# EAGLE board Pcb (EAGLE 9.7.0)
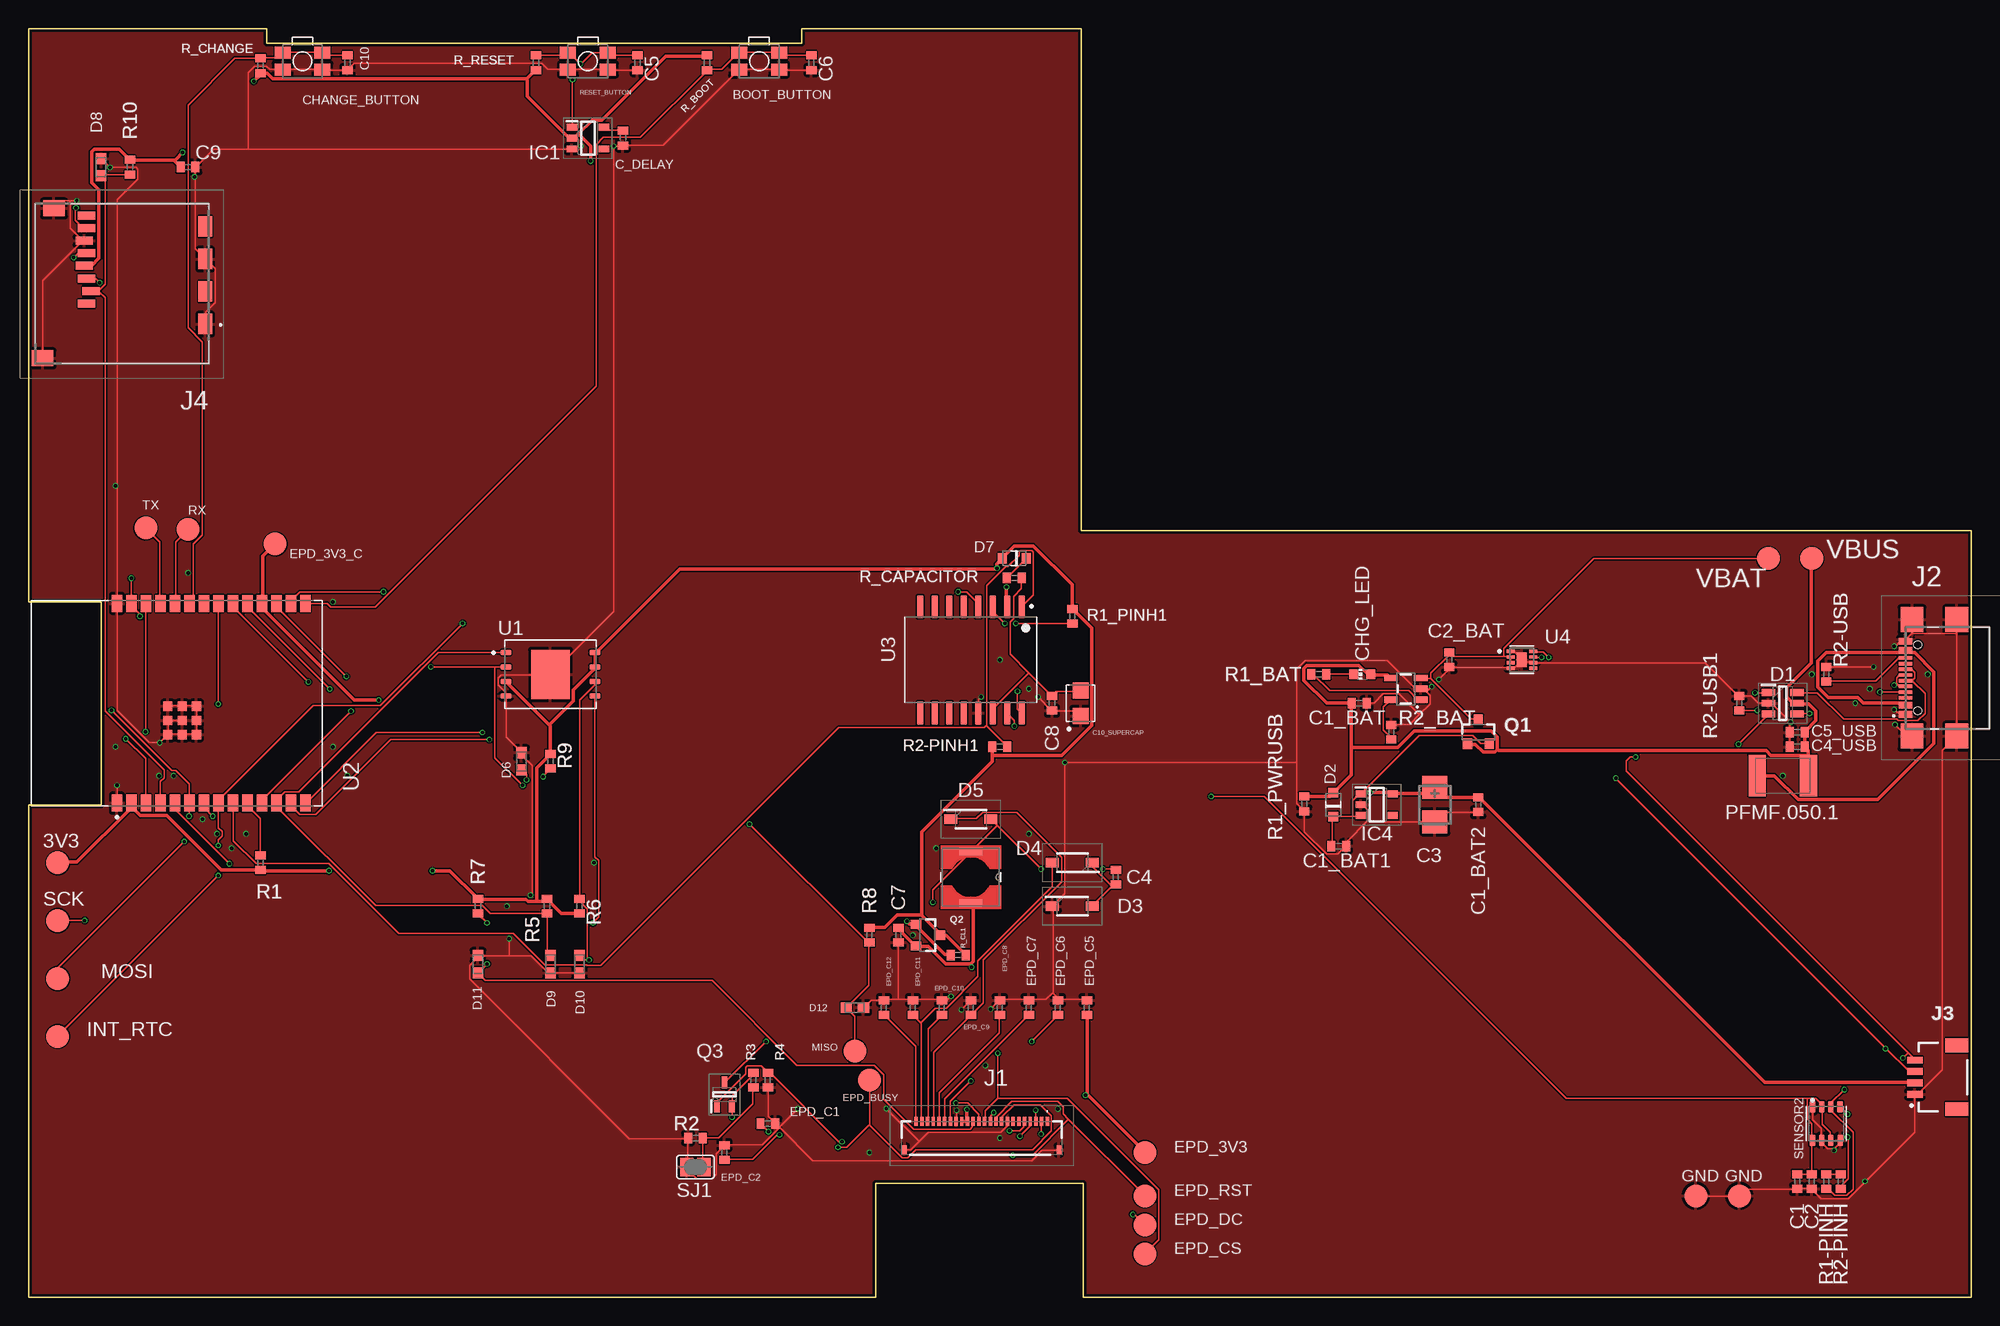
[diagram p0: board, top side]
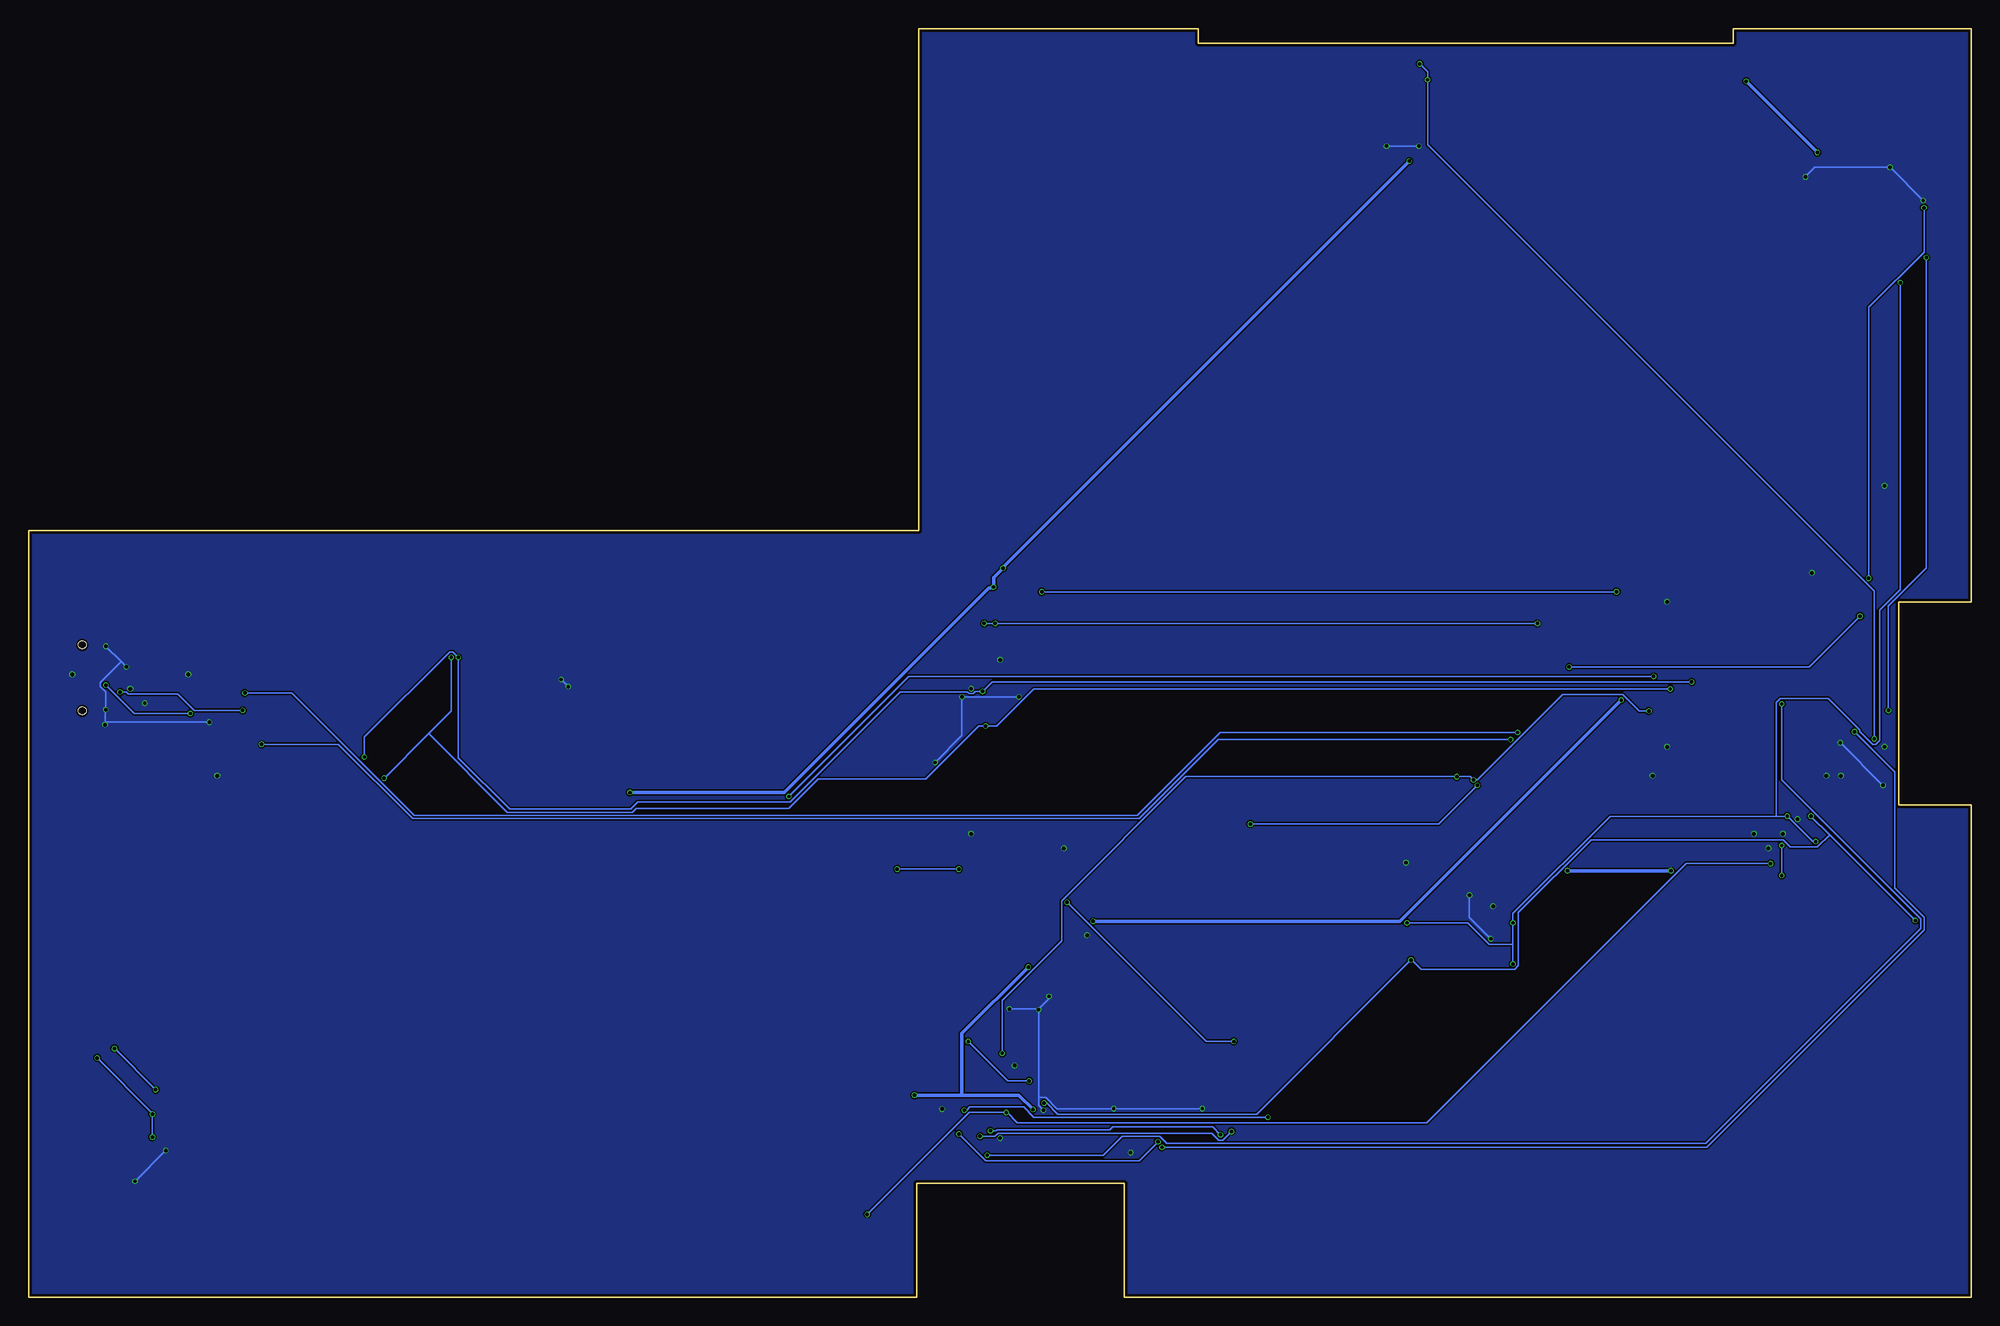
[diagram p1: board, bottom side, seen from below]

Size 170.2 x 111.2 mm. Coordinates in mm from the lower left corner, seen from the top.
Outline: 0,0 0,43.18 6.35,43.18 6.35,60.96 0,60.96 0,111.2 20.89,111.2 20.89,109.9 67.75,109.9 67.75,111.2 92.2,111.2 92.2,67.2 170.2,67.2 170.2,0 92.4,0 92.4,10 74.2,10 74.2,0 0,0
Copper layers (1*16): Top 0.035mm / dielectric 1.6mm / Bottom 0.035mm
Design rules "jlcpcb-2layers.dru *": minimum track width 0.15mm, minimum drill 0.3mm, track to track 5mil, track to pad 5mil, pad to pad 5mil, via to via 5mil, smd to smd 5mil, copper to edge 0.2mm, drill to drill 6mil, minimum pad ring 10mil, minimum via ring 3mil, stop-mask expansion 4mil, vias tented up to drill 0mil, thermal gap 10mil
Net classes: 1 power: width 0.3 mm

## Footprints (pad centres in the part's own frame; a part is rotated, then mirrored left to right if it is on the bottom)
MYBUTTON = smd 1.4 x 1.05: 1 1.75,0.75; 2 -1.75,0.75; 3 -1.75,-0.75; 4 1.75,-0.75
EAGLE-LTSPICE_C0402 = smd 0.7 x 0.9: 1 -0.65,0; 2 0.65,0
RCL_CT3528 = smd 2 x 2.2: + -1.5,0; - 1.5,0
CAPCP3225X100N = smd 1.4 x 1.4: 1 -1.1,0; 2 1.1,0
ADAFRUIT_CHIP-LED0603 = smd 0.8 x 0.8: A 0,-0.75; C 0,0.75
SOT95P280X145-6N = smd 1.2 x 0.6: 1 -1.25,0.95; 2 -1.25,0; 3 -1.25,-0.95; 4 1.25,-0.95; 5 1.25,0; 6 1.25,0.95
ESP32_WROVER_AVX---SD0805S020S1R0_AVX_SD0805S020S1R0_0 = smd 0.8 x 0.9: 1 -1.05,0; 2 1.05,0
SOD3716X135N = smd 1.15 x 0.8: 1 -1.75,0; 2 1.75,0
DIOC1608X36N = smd 0.97 x 0.94: 1 -0.75,0; 2 0.75,0
SOT95P280X125-5N = smd 0.9 x 0.6: 1 -1.4,0.95; 2 -1.4,0; 3 -1.4,-0.95; 4 1.4,-0.95; 5 1.4,0.95
SOT95P280X120-5N = smd 0.9 x 0.6: 1 -1.4,0.95; 2 -1.4,0; 3 -1.4,-0.95; 4 1.4,-0.95; 5 1.4,0.95
FH34SRJ24S05SH99 = smd 0.3 x 0.8: 1 5.75,1.45; 2 5.25,1.45; 3 4.75,1.45; 4 4.25,1.45; 5 3.75,1.45; 6 3.25,1.45; 7 2.75,1.45; 8 2.25,1.45; 9 1.75,1.45; 10 1.25,1.45; 11 0.75,1.45; 12 0.25,1.45; 13 -0.25,1.45; 14 -0.75,1.45; 15 -1.25,1.45; 16 -1.75,1.45; 17 -2.25,1.45; 18 -2.75,1.45; 19 -3.25,1.45; 20 -3.75,1.45; 21 -4.25,1.45; 22 -4.75,1.45; 23 -5.25,1.45; 24 -5.75,1.45 | smd 0.4 x 0.8: MP1 6.75,-1.05; MP2 -6.75,-1.05
SAMACSYS_PARTS_USB4110GFA = smd 0.3 x 1.15: A1 -3.35,3.678; A4 -2.55,3.678; A5 -1.25,3.678; A6 -0.25,3.678; A7 0.25,3.678; A8 1.25,3.678; A9 2.55,3.678; A12 3.35,3.678; B1 3.05,3.678; B4 2.25,3.678; B5 1.75,3.678; B6 0.75,3.678; B7 -0.75,3.678; B8 -1.75,3.678; B9 -2.25,3.678; B12 -3.05,3.678 | smd 2.18 x 2: MP1 -5.11,-0.827; MP2 5.11,-0.827; MP3 -5.11,3.103; MP4 5.11,3.103 | hole 0.65: -2.89,2.603; 2.89,2.603
JST04_1MM_RA = smd 0.6 x 1.35: 1 -1.5,0; 2 -0.5,0; 3 0.5,0; 4 1.5,0 | smd 1.2 x 2: NC1 2.8,-3.675; NC2 -2.8,-3.675
112ATAARR03ATTEND = smd 1.8 x 1.2: G1 10.6,10.4; G2 4.9,10.4; S1 7.75,10.4; S2 2.05,10.4 | smd 1.4 x 1.9: G3 13.6,-3.85; G4 0.45,-2.85 | smd 0.7 x 1.5: P1 8.8,0; P2 7.7,0.4; P3 6.6,0; P4 5.5,-0.2; P5 4.4,0; P6 3.3,-0.2; P7 2.2,0; P8 1.1,0
IND_4828-WE-TPC_WRE = smd 0.635 x 2.032: 1 -2.286,0; 2 2.286,0
ESP32_WROVER_SPARKFUN-IC-POWER_SOT23-5 = smd 0.55 x 1.2: 1 -0.95,-1.3; 2 0,-1.3; 3 0.95,-1.3; 4 0.95,1.3; 5 -0.95,1.3
ESP32C6_VARISTOR_CT/CN1812 = smd 1.5 x 3.6: 1 -2.25,0; 2 2.25,0
ESP32_WROVER_SPARKFUN-DISCRETESEMI_SOT23-3 = smd 0.8 x 0.9: 1 -0.95,-1; 2 0.95,-1; 3 0,1.1
SOT65P210X110-3N = smd 1.05 x 0.5: 1 -1.05,0.65; 2 -1.05,-0.65; 3 1.05,0
ESP32_WROVER_EAGLE-LTSPICE_R0402 = smd 0.7 x 0.9: 1 -0.65,0; 2 0.65,0
ESP32_WROVER_BME680_PSON80P300X300X100-8N = smd 1.016 x 0.5: 1 1.458,1.2; 2 1.458,0.4; 3 1.458,-0.4; 4 1.458,-1.2; 5 -1.458,-1.22; 6 -1.458,-0.4; 7 -1.458,0.4; 8 -1.458,1.2
SJ = smd 1.168 x 1.6: 1 -0.762,0; 2 0.762,0
TP20R = smd 2 x 2: TP 0,0
SON127P600X800X80-9N = smd 0.94 x 0.44: 1 -3.895,1.905; 2 -3.895,0.635; 3 -3.895,-0.635; 4 -3.895,-1.905; 5 3.895,-1.905; 6 3.895,-0.635; 7 3.895,0.635; 8 3.895,1.905 | smd 3.4 x 4.3: 9 0,0
XCVR_ESP32-C6-WROOM-1-N8 = smd 1.5 x 0.9: 1 -8.75,5.26; 2 -8.75,3.99; 3 -8.75,2.72; 4 -8.75,1.45; 5 -8.75,0.18; 6 -8.75,-1.09; 7 -8.75,-2.36; 8 -8.75,-3.63; 9 -8.75,-4.9; 10 -8.75,-6.17; 11 -8.75,-7.44; 12 -8.75,-8.71; 13 -8.75,-9.98; 14 -8.75,-11.25; 15 8.75,-11.25; 16 8.75,-9.98; 17 8.75,-8.71; 18 8.75,-7.44; 19 8.75,-6.17; 20 8.75,-4.9; 21 8.75,-3.63; 22 8.75,-2.36; 23 8.75,-1.09; 24 8.75,0.18; 25 8.75,1.45; 26 8.75,2.72; 27 8.75,3.99; 28 8.75,5.26 | smd 0.8 x 0.8: 29_1 -2.755,0.79; 29_2 -1.505,0.79; 29_3 -0.255,0.79; 29_4 -2.755,-0.46; 29_5 -1.505,-0.46; 29_6 -0.255,-0.46; 29_7 -2.755,-1.71; 29_8 -1.505,-1.71; 29_9 -0.255,-1.71
SOIC127P1032X265-16N = smd 2.05 x 0.59: 1 -4.655,4.445; 2 -4.655,3.175; 3 -4.655,1.905; 4 -4.655,0.635; 5 -4.655,-0.635; 6 -4.655,-1.905; 7 -4.655,-3.175; 8 -4.655,-4.445; 9 4.655,-4.445; 10 4.655,-3.175; 11 4.655,-1.905; 12 4.655,-0.635; 13 4.655,0.635; 14 4.655,1.905; 15 4.655,3.175; 16 4.655,4.445
SON50P200X200X80-9N = smd 0.76 x 0.27: 1 -0.985,0.75; 2 -0.985,0.25; 3 -0.985,-0.25; 4 -0.985,-0.75; 5 0.985,-0.75; 6 0.985,-0.25; 7 0.985,0.25; 8 0.985,0.75 | smd 0.9 x 1.3: 9 0,0

## Placement (x,y rotation side)
BOOT_BUTTON  BUTTON_CUSYOMV1  [MYBUTTON]  64,108.35 180 top
C1  100nF  [EAGLE-LTSPICE_C0402]  154.94,10.16 270 top
C1_BAT  4.7uF  [EAGLE-LTSPICE_C0402]  116.57,52.07 0 top
C1_BAT1  4.7uF  [EAGLE-LTSPICE_C0402]  114.78,39.55 0 top
C1_BAT2  4.7uF  [EAGLE-LTSPICE_C0402]  127,43.18 270 top
C2  100nF  [EAGLE-LTSPICE_C0402]  156.21,10.16 270 top
C2_BAT  4.7uF  [EAGLE-LTSPICE_C0402]  124.46,55.88 270 top
C3  100uF TANT  [RCL_CT3528]  123.19,43.18 270 top
C4  4.7uF/25V  [EAGLE-LTSPICE_C0402]  95.25,36.83 90 top
C4_USB  100nF  [EAGLE-LTSPICE_C0402]  154.94,48.26 180 top
C5  1uF  [EAGLE-LTSPICE_C0402]  53.34,108.2 270 top
C5_USB  4.7uF  [EAGLE-LTSPICE_C0402]  154.94,49.53 180 top
C6  100nF  [EAGLE-LTSPICE_C0402]  68.58,108.2 270 top
C7  10uF  [EAGLE-LTSPICE_C0402]  76.2,31.75 270 top
C8  100nF  [EAGLE-LTSPICE_C0402]  89.66,52.07 270 top
C9  100nF  [EAGLE-LTSPICE_C0402]  13.97,99.06 0 top
C10  100nF  [EAGLE-LTSPICE_C0402]  27.94,108.2 270 top
C10_SUPERCAP  CPH3225A  [CAPCP3225X100N]  92.16,52.07 90 top
C_DELAY  100nF  [EAGLE-LTSPICE_C0402]  52.07,101.6 270 top
CHANGE_BUTTON  BUTTON_CUSYOMV1  [MYBUTTON]  24,108.35 180 top
CHG_LED  [ADAFRUIT_CHIP-LED0603]  116.84,54.61 90 top
D1  USBLC6-2SC6Y  [SOT95P280X145-6N]  153.67,52.07 0 top
D2  ESP32_WROVER_AVX---SD0805S020S1R0_AVX_SD0805S020S1R0_0_0AVX_SD0805S020S1R0_0_0  [ESP32_WROVER_AVX---SD0805S020S1R0_AVX_SD0805S020S1R0_0]  114.3,43.18 90 top
D3  MBR0530  [SOD3716X135N]  91.44,34.29 0 top
D4  MBR0530  [SOD3716X135N]  91.44,38.1 180 top
D5  MBR0530  [SOD3716X135N]  82.55,41.91 0 top
D6  PGB1010603MR  [DIOC1608X36N]  43.18,46.99 90 top
D7  ESP32_WROVER_AVX---SD0805S020S1R0_AVX_SD0805S020S1R0_0_0AVX_SD0805S020S1R0_0_0  [ESP32_WROVER_AVX---SD0805S020S1R0_AVX_SD0805S020S1R0_0]  86.36,64.77 180 top
D8  PGB1010603MR  [DIOC1608X36N]  6.35,99.06 90 top
D9  PGB1010603MR  [DIOC1608X36N]  45.72,29.21 270 top
D10  PGB1010603MR  [DIOC1608X36N]  48.26,29.21 270 top
D11  PGB1010603MR  [DIOC1608X36N]  39.37,29.21 90 top
D12  PGB1010603MR  [DIOC1608X36N]  72.39,25.4 0 top
EPD_C1  1uF/50V  [EAGLE-LTSPICE_C0402]  64.77,15.24 0 top
EPD_C2  1uF/50V  [EAGLE-LTSPICE_C0402]  60.96,12.7 90 top
EPD_C5  0.1uF/50V  [EAGLE-LTSPICE_C0402]  92.71,25.4 90 top
EPD_C6  1uF/50V  [EAGLE-LTSPICE_C0402]  90.17,25.4 90 top
EPD_C7  1uF/50V  [EAGLE-LTSPICE_C0402]  87.63,25.4 90 top
EPD_C8  1uF/50V  [EAGLE-LTSPICE_C0402]  85.09,25.4 90 top
EPD_C9  1uF/50V  [EAGLE-LTSPICE_C0402]  82.55,25.4 90 top
EPD_C10  1uF/50V  [EAGLE-LTSPICE_C0402]  80.01,25.4 90 top
EPD_C11  1uF/50V  [EAGLE-LTSPICE_C0402]  77.47,25.4 90 top
EPD_C12  1uF/50V  [EAGLE-LTSPICE_C0402]  74.93,25.4 90 top
IC1  BD5229G-TR  [SOT95P280X125-5N]  49,101.6 0 top
IC4  XC6220A331MR-G  [SOT95P280X120-5N]  118.11,43.18 0 top
J1  FH34SRJ-24S-0.5SH_99_  [FH34SRJ24S05SH99]  83.5,13.97 0 top
J2  SAMACSYS_PARTS_USB4110-GF-A  [SAMACSYS_PARTS_USB4110GFA]  168.1,54.3 90 top
J3  QWIIC_RIGHT_ANGLE  [JST04_1MM_RA]  165.25,19.3 90 top
J4  112A-TAAR-R03_ATTEND  [112ATAARR03ATTEND]  5.08,95.9 270 top
L1  68uH  [IND_4828-WE-TPC_WRE]  82.55,36.83 270 top
MCP  MCP73831  [ESP32_WROVER_SPARKFUN-IC-POWER_SOT23-5]  120.65,53.34 90 top
PFMF.050.1  [ESP32C6_VARISTOR_CT/CN1812]  153.67,45.72 0 top
Q1  20V/4.2A/52mΩ/1.4W  [ESP32_WROVER_SPARKFUN-DISCRETESEMI_SOT23-3]  127,49.53 0 top
Q2  20V/4.2A/52mΩ/1.4W  [ESP32_WROVER_SPARKFUN-DISCRETESEMI_SOT23-3]  78.74,31.75 270 top
Q3  SI1308EDL-T1-GE3  [SOT65P210X110-3N]  60.96,17.78 90 top
R1  10K  [ESP32_WROVER_EAGLE-LTSPICE_R0402]  20.32,38.1 90 top
R1-PINH  10K  [ESP32_WROVER_EAGLE-LTSPICE_R0402]  157.48,10.16 90 top
R1_BAT  200  [ESP32_WROVER_EAGLE-LTSPICE_R0402]  113.03,54.61 0 top
R1_PINH1  10K  [ESP32_WROVER_EAGLE-LTSPICE_R0402]  91.44,59.69 90 top
R1_PWRUSB  100K  [ESP32_WROVER_EAGLE-LTSPICE_R0402]  111.76,43.25 90 top
R2  2.2  [ESP32_WROVER_EAGLE-LTSPICE_R0402]  58.42,13.97 0 top
R2-PINH  10K  [ESP32_WROVER_EAGLE-LTSPICE_R0402]  158.75,10.16 90 top
R2-PINH1  10K  [ESP32_WROVER_EAGLE-LTSPICE_R0402]  85.09,48.26 180 top
R2-USB  5k1  [ESP32_WROVER_EAGLE-LTSPICE_R0402]  157.48,54.61 90 top
R2-USB1  5k1  [ESP32_WROVER_EAGLE-LTSPICE_R0402]  149.86,52.07 270 top
R2_BAT  2K  [ESP32_WROVER_EAGLE-LTSPICE_R0402]  119.38,49.53 270 top
R3  0.47  [ESP32_WROVER_EAGLE-LTSPICE_R0402]  63.5,19.05 270 top
R4  10K  [ESP32_WROVER_EAGLE-LTSPICE_R0402]  64.77,19.05 270 top
R5  10K  [ESP32_WROVER_EAGLE-LTSPICE_R0402]  45.42,34.29 90 top
R6  10K  [ESP32_WROVER_EAGLE-LTSPICE_R0402]  48.26,34.29 270 top
R7  10K  [ESP32_WROVER_EAGLE-LTSPICE_R0402]  39.37,34.29 90 top
R8  10K  [ESP32_WROVER_EAGLE-LTSPICE_R0402]  73.66,31.75 90 top
R9  10K  [ESP32_WROVER_EAGLE-LTSPICE_R0402]  45.72,46.99 90 top
R10  10K  [ESP32_WROVER_EAGLE-LTSPICE_R0402]  8.89,99.06 90 top
R_BOOT  10K  [ESP32_WROVER_EAGLE-LTSPICE_R0402]  59.43,108.2 270 top
R_CAPACITOR  15  [ESP32_WROVER_EAGLE-LTSPICE_R0402]  86.36,63.06 180 top
R_CHANGE  10K  [ESP32_WROVER_EAGLE-LTSPICE_R0402]  20.32,107.95 90 top
R_CL1  10K  [ESP32_WROVER_EAGLE-LTSPICE_R0402]  81.43,30.01 180 top
R_RESET  10K  [ESP32_WROVER_EAGLE-LTSPICE_R0402]  44.45,108.2 90 top
RESET_BUTTON  BUTTON_CUSYOMV1  [MYBUTTON]  49,108.35 180 top
SENSOR2  BME688  [ESP32_WROVER_BME680_PSON80P300X300X100-8N]  157.48,15.24 90 top
SJ1  [SJ]  58.42,11.43 0 top
TP1  TPTP20R  [TP20R]  10.28,67.43 0 top
TP2  TPTP20R  [TP20R]  13.97,67.31 0 top
TP3  TPTP20R  [TP20R]  152.4,64.77 0 top
TP4  TPTP20R  [TP20R]  146.05,8.89 0 top
TP5  TPTP20R  [TP20R]  149.86,8.89 0 top
TP6  TPTP20R  [TP20R]  72.39,21.59 0 top
TP7  TPTP20R  [TP20R]  2.54,27.94 0 top
TP8  TPTP20R  [TP20R]  2.55,33.02 0 top
TP9  TPTP20R  [TP20R]  73.66,19.05 0 top
TP10  TPTP20R  [TP20R]  97.79,3.81 0 top
TP11  TPTP20R  [TP20R]  97.79,6.35 0 top
TP12  TPTP20R  [TP20R]  97.79,8.89 0 top
TP13  TPTP20R  [TP20R]  21.6,66.04 0 top
TP14  TPTP20R  [TP20R]  156.21,64.77 0 top
TP15  TPTP20R  [TP20R]  2.54,22.86 0 top
TP16  TPTP20R  [TP20R]  2.54,38.1 0 top
TP17  TPTP20R  [TP20R]  97.79,12.7 0 top
U1  W25Q512JVEIQ  [SON127P600X800X80-9N]  45.72,54.61 0 top
U2  ESP32-C6-WROOM-1-N8  [XCVR_ESP32-C6-WROOM-1-N8]  13,52.07 90 top
U3  DS3231SN#  [SOIC127P1032X265-16N]  82.55,55.88 270 top
U4  MAX17048G+T10  [SON50P200X200X80-9N]  130.81,55.88 0 top

## Library data of the parts
BOOT_BUTTON CHANGE_BUTTON CHG_LED PFMF.050.1 RESET_BUTTON SJ1 TP1-TP17 = DeskAssistant v19 v1
C1 C1_BAT C1_BAT1 C1_BAT2 C2 C2_BAT C4 C4_USB C5 C5_USB C6-C10 C_DELAY EPD_C1 EPD_C2 EPD_C5-EPD_C12 = DeskAssistant v19 v1; SPICEMODEL: NONE; SPICEPREFIX: C
C3 = DeskAssistant v19 v1; SPICEPREFIX: C
C10_SUPERCAP = DeskAssistant v19 v1; AVAILABILITY: Not in stock; CHECK_PRICES: https://www.snapeda.com/parts/CPH3225A/Seiko+Instruments/view-part/?ref=eda; DESCRIPTION: 11 mF (EDLC) Supercapacitor 3.3 V 1210 (3225 Metric) - -; MF: Seiko Instruments; MP: CPH3225A; PACKAGE: 1210 Seiko; PRICE: None; PURCHASE-URL: https://www.snapeda.com/api/url_track_click_mouser/?unipart_id=562593&manufacturer=Seiko Instruments&part_name=CPH3225A&search_term=None; SNAPEDA_LINK: https://www.snapeda.com/parts/CPH3225A/Seiko+Instruments/view-part/?ref=snap
D1 = DeskAssistant v19 v1; AVAILABILITY: In Stock; CHECK_PRICES: https://www.snapeda.com/parts/USBLC6-2SC6Y/STMicroelectronics/view-part/?ref=eda; DESCRIPTION: 17V Clamp 5A (8/20µs) Ipp Tvs Diode Surface Mount SOT-23-6; MF: STMicroelectronics; MP: USBLC6-2SC6Y; PACKAGE: SOT-23-6 STMicroelectronics; PRICE: None; SNAPEDA_LINK: https://www.snapeda.com/parts/USBLC6-2SC6Y/STMicroelectronics/view-part/?ref=snap
D2 D7 = DeskAssistant v19 v1; CENTROID_NOT_SPECIFIED: No; DATASHEET: http://datasheets.avx.com/schottky.pdf; DIGIKEY_DESCRIPTION: DIODE SCHOTTKY 20V 1A 0805; DIGIKEY_PART_NUMBER: 478-7800-1-ND; LEAD_FREE: yes; MF: AVX; MOUSER_PART_NUMBER: 581-SD0805S020S1R0; PACKAGE: 0805 (2012 metric); PREFIX: D; ROHS: yes; SER: SD0805S020S1R0; TEMPERATURE_RANGE_HIGH: +125°C; TEMPERATURE_RANGE_LOW: -55°C
D3-D5 = DeskAssistant v19 v1; AVAILABILITY: In Stock; CHECK_PRICES: https://www.snapeda.com/parts/MBR0530/Onsemi/view-part/?ref=eda; DESCRIPTION: Diode Schottky 30 V 500mA Surface Mount SOD-123; MF: ON Semiconductor; MP: MBR0530; PACKAGE: SOD-123-2 ON Semiconductor; PRICE: None; PURCHASE-URL: https://www.snapeda.com/api/url_track_click_mouser/?unipart_id=179458&manufacturer=ON Semiconductor&part_name=MBR0530&search_term=None; SNAPEDA_LINK: https://www.snapeda.com/parts/MBR0530/Onsemi/view-part/?ref=snap
D6 D8-D12 = DeskAssistant v19 v1; AVAILABILITY: In Stock; CHECK_PRICES: https://www.snapeda.com/parts/PGB1010603MR/Littelfuse/view-part/?ref=eda; DESCRIPTION: 150V (Typ) Clamp - Ipp Tvs Diode Surface Mount 0603 (1608 Metric); MF: Littelfuse Inc.; MP: PGB1010603MR; PACKAGE: 0603 Littelfuse Inc.; PRICE: None; PURCHASE-URL: https://www.snapeda.com/api/url_track_click_mouser/?unipart_id=5659453&manufacturer=Littelfuse Inc.&part_name=PGB1010603MR&search_term=None; SNAPEDA_LINK: https://www.snapeda.com/parts/PGB1010603MR/Littelfuse/view-part/?ref=snap
IC1 = DeskAssistant v19 v1; DESCRIPTION: Voltage Detector with Adjustable Delay Time: CMOS processes are utilized to develop high precision, low current consumption CMOS reset ICs that allow arbitrary setting of the delay time. The extensive lineup includes both Nch Open Drain and CMOS output types in a wide range of detection voltages (from 2.3V to 6.0V, in 0.1V steps), enabling selection of the ideal solution based on customer requirements. In addition, the entire series is of course both lead-free and RoHS-compliant.; HEIGHT: 1.25mm; MANUFACTURER_NAME: ROHM Semiconductor; MANUFACTURER_PART_NUMBER: BD5229G-TR; MOUSER_PART_NUMBER: 755-BD5229G-TR; MOUSER_PRICE-STOCK: https://www.mouser.co.uk/ProductDetail/ROHM-Semiconductor/BD5229G-TR?qs=4kLU8WoGk0vvnhrrYwdszw%3D%3D
IC4 = DeskAssistant v19 v1; DESCRIPTION: LDO Voltage Regulators; HEIGHT: 1.2mm; MANUFACTURER_NAME: Torex; MANUFACTURER_PART_NUMBER: XC6220A331MR-G; MOUSER_PART_NUMBER: 865-XC6220A331MR-G; MOUSER_PRICE-STOCK: https://www.mouser.co.uk/ProductDetail/Torex-Semiconductor/XC6220A331MR-G?qs=AsjdqWjXhJ8ZSWznL1J0gg%3D%3D
J1 = DeskAssistant v19 v1; DESCRIPTION: 24 Position FFC, FPC Connector Contacts, Top and Bottom 0.020" (0.50mm) Surface Mount, Right Angle; HEIGHT: 1.1mm; MANUFACTURER_NAME: Hirose; MANUFACTURER_PART_NUMBER: FH34SRJ-24S-0.5SH(99); MOUSER_PART_NUMBER: 798-FH34SRJ24S05SH99; MOUSER_PRICE-STOCK: https://www.mouser.co.uk/ProductDetail/Hirose-Connector/FH34SRJ-24S-0.5SH99?qs=vcbW%252B4%252BSTIpKBl5ap9J8Fw%3D%3D
J2 = DeskAssistant v19 v1; DESCRIPTION: CONN USB 2.0 TYPE-C R/A SMT; HEIGHT: 3.26mm; MANUFACTURER_NAME: GCT (GLOBAL CONNECTOR TECHNOLOGY); MANUFACTURER_PART_NUMBER: USB4110-GF-A; MOUSER_PART_NUMBER: 640-USB4110-GF-A; MOUSER_PRICE-STOCK: https://www.mouser.co.uk/ProductDetail/GCT/USB4110-GF-A?qs=KUoIvG%2F9IlYiZvIXQjyJeA%3D%3D
J3 = DeskAssistant v19 v1; PROD_ID: CONN-13694
J4 = DeskAssistant v19 v1; DESCRIPTION: Micro SD Card Socket, Push-Push Type, Top Mount, SMT, H=1.83mm, 10u; HEIGHT: 1.9mm; MANUFACTURER_NAME: ATTEND; MANUFACTURER_PART_NUMBER: 112A-TAAR-R03 ATTEND
L1 = DeskAssistant v19 v1; COPYRIGHT: Copyright (C) 2024 Ultra Librarian. All rights reserved.; MANUFACTURER_PART_NUMBER: 744043680; MFR_NAME: Wurth Electronics
MCP = DeskAssistant v19 v1; PROD_ID: IC-09995
Q1 Q2 = DeskAssistant v19 v1; PROD_ID: TRAN-14388; SER: DMG2305UX-7
Q3 = DeskAssistant v19 v1; AVAILABILITY: In Stock; CHECK_PRICES: https://www.snapeda.com/parts/SI1308EDL-T1-GE3/Vishay+Siliconix/view-part/?ref=eda; DESCRIPTION: Si1308EDL-T1-GE3 N-channel MOSFET Transistor, 1.5 A, 30 V, 3-Pin SC-70 | Siliconix / Vishay SI1308EDL-T1-GE3; MF: Vishay Siliconix; MP: SI1308EDL-T1-GE3; PACKAGE: SOT-323 Vishay Semiconductor; PRICE: None; PURCHASE-URL: https://www.snapeda.com/api/url_track_click_mouser/?unipart_id=274603&manufacturer=Vishay Siliconix&part_name=SI1308EDL-T1-GE3&search_term=None; SNAPEDA_LINK: https://www.snapeda.com/parts/SI1308EDL-T1-GE3/Vishay+Siliconix/view-part/?ref=snap
R1 R1-PINH R1_BAT R1_PINH1 R1_PWRUSB R2 R2-PINH R2-PINH1 R2-USB R2-USB1 R2_BAT R3-R10 R_BOOT R_CAPACITOR R_CHANGE R_CL1 R_RESET = DeskAssistant v19 v1; SPICEMODEL: NONE; SPICEPREFIX: R
SENSOR2 = DeskAssistant v19 v1; AVAILABILITY: Unavailable; DESCRIPTION: Integrated Environmental Unit; MF: Bosch Sensortec; MP: BME680; PACKAGE: LGA-8 Bosch Tools; PRICE: None
U1 = DeskAssistant v19 v1; AVAILABILITY: In Stock; CHECK_PRICES: https://www.snapeda.com/parts/W25Q512JVEIQ/Winbond+Electronics/view-part/?ref=eda; DESCRIPTION: FLASH - NOR Memory IC 512Mb (64M x 8) SPI - Quad I/O 133 MHz 8-WSON (8x6); MF: Winbond Electronics; MP: W25Q512JVEIQ; PACKAGE: Package; PRICE: None; SNAPEDA_LINK: https://www.snapeda.com/parts/W25Q512JVEIQ/Winbond+Electronics/view-part/?ref=snap
U2 = DeskAssistant v19 v1; AVAILABILITY: In Stock; CHECK_PRICES: https://www.snapeda.com/parts/ESP32-C6-WROOM-1-N8/Espressif+Systems/view-part/?ref=eda; DESCRIPTION: Multiprotocol Modules ESP32-C6 module, Wi-Fi 6 in 2.4 GHz band, Bluetooth 5, Zigbee 3.0 and Thread. ESP34-WROOM Compatible - ENGINEERING SAMPLE; MF: Espressif Systems; MP: ESP32-C6-WROOM-1-N8; PACKAGE: None; PRICE: None; SNAPEDA_LINK: https://www.snapeda.com/parts/ESP32-C6-WROOM-1-N8/Espressif+Systems/view-part/?ref=snap
U3 = DeskAssistant v19 v1; AVAILABILITY: In Stock; CHECK_PRICES: https://www.snapeda.com/parts/DS3231SN%23/Analog+Devices/view-part/?ref=eda; DESCRIPTION: Extremely Accurate I²C-Integrated RTC/TCXO/Crystal; MF: Analog Devices; MP: DS3231SN#; PACKAGE: SOIC-16 Maxim; PRICE: None; PURCHASE-URL: https://www.snapeda.com/api/url_track_click_mouser/?unipart_id=99048&manufacturer=Analog Devices&part_name=DS3231SN#&search_term=None; SNAPEDA_LINK: https://www.snapeda.com/parts/DS3231SN%23/Analog+Devices/view-part/?ref=snap
U4 = DeskAssistant v19 v1; AVAILABILITY: In Stock; CHECK_PRICES: https://www.snapeda.com/parts/MAX17048G+T10/Analog+Devices/view-part/?ref=eda; DESCRIPTION: 3µA 1-Cell/2-Cell Fuel Gauge with ModelGauge; MF: Analog Devices; MP: MAX17048G+T10; PACKAGE: TDFN-8 Maxim; PRICE: None; PURCHASE-URL: https://www.snapeda.com/api/url_track_click_mouser/?unipart_id=329239&manufacturer=Analog Devices&part_name=MAX17048G+T10&search_term=None; SNAPEDA_LINK: https://www.snapeda.com/parts/MAX17048G+T10/Analog+Devices/view-part/?ref=snap

## Nets
3V3 [power]: C1_BAT2.1 C3.+ C9.1 D7.2 IC1.2 IC4.5 J3.2 J4.P4 Q2.3 R1.1 R1_PINH1.2 R2-PINH1.2 R5.2 R6.2 R7.2 R8.2 R9.2 R10.2 R_BOOT.1 R_CHANGE.1 R_CL1.1 R_RESET.1 TP16.TP U1.3 U1.7 U1.8 U2.2 U3.2
32KHZ: R2-PINH1.1 U2.9 U3.1
DN: D1.4 J2.A7 J2.B7
DP: D1.6 J2.A6 J2.B6
EPD_3V3 [power]: C7.1 EPD_C5.1 J1.15 J1.16 L1.2 Q2.2 TP17.TP
EPD_3V3_C [power]: Q2.1 R_CL1.2 TP13.TP U2.18
EPD_BUSY: J1.9 TP9.TP U2.26
EPD_CS: D6.1 J1.12 R9.1 TP10.TP U2.11
EPD_DC: J1.11 TP11.TP U2.5
EPD_RST: J1.10 TP12.TP U2.21
FLASH_CS: D9.1 R5.1 U1.1 U2.12
GDR: J1.2 Q3.1 R4.1
GND: BOOT_BUTTON.1 BOOT_BUTTON.2 C1.2 C1_BAT1.2 C1_BAT2.2 C1_BAT.2 C2.2 C2_BAT.2 C3.- C4_USB.2 C5.2 C5_USB.2 C6.2 C7.2 C8.2 C9.2 C10.2 C10_SUPERCAP.1 C_DELAY.2 CHANGE_BUTTON.1 CHANGE_BUTTON.2 D1.2 D3.1 D6.2 D8.2 D9.2 D10.2 D11.2 D12.2 EPD_C1.2 EPD_C2.2 EPD_C5.2 EPD_C6.2 EPD_C7.2 EPD_C8.2 EPD_C9.2 EPD_C10.2 EPD_C11.2 EPD_C12.2 IC1.3 IC4.2 J1.8 J1.17 J1.MP1 J1.MP2 J2.A1 J2.A12 J2.B1 J2.B12 J2.MP1 J2.MP2 J2.MP3 J2.MP4 J3.1 J4.G1 J4.G2 J4.G3 J4.G4 J4.P6 MCP.2 R1_PWRUSB.1 R2-USB1.1 R2-USB.2 R2.1 R2_BAT.1 R4.2 RESET_BUTTON.1 RESET_BUTTON.2 SENSOR2.1 SENSOR2.5 SENSOR2.7 SJ1.1 TP4.TP TP5.TP U1.4 U1.9 U2.1 U2.28 U2.29_1 U2.29_2 U2.29_3 U2.29_4 U2.29_5 U2.29_6 U2.29_7 U2.29_8 U2.29_9 U3.13 U4.1 U4.4 U4.6 U4.9
GPIO8: R1.2 U2.10
I2C_PW: C1.1 C2.1 SENSOR2.2 SENSOR2.6 SENSOR2.8 U2.17
INT_RTC: R1_PINH1.1 TP15.TP U2.8 U3.3
IO/BOOT: BOOT_BUTTON.3 BOOT_BUTTON.4 C6.1 R_BOOT.2 U2.15
IO/CHANGE: C10.1 CHANGE_BUTTON.3 CHANGE_BUTTON.4 R_CHANGE.2 U2.23
MISO: D12.1 J4.P7 R8.1 TP6.TP U1.2 U2.27
MOSI: D11.1 J1.14 J4.P3 R7.1 TP7.TP U1.5 U2.7
N$1: J2.A5 R2-USB1.2
N$2: J2.B5 R2-USB.1
N$3: C1_BAT1.1 D2.1 IC4.1 IC4.3 Q1.2
N$4: C4.1 D3.2 D4.1
N$5: CHG_LED.C R1_BAT.2
N$6: MCP.1 R1_BAT.1
N$7: EPD_C12.1 J1.24
N$8: R1-PINH.2 R2-PINH.2
N$9: MCP.5 R2_BAT.2
N$10: EPD_C10.1 J1.22
N$11: C_DELAY.1 IC1.5
N$12: EPD_C8.1 J1.20
N$13: EPD_C7.1 J1.19
N$14: EPD_C6.1 J1.18
N$15: D7.1 R_CAPACITOR.2
N$25: EPD_C2.1 J1.5
N$26: EPD_C1.1 J1.4
PREVGH: D5.1 EPD_C9.1 J1.21
PREVGL: D4.2 EPD_C11.1 J1.23
RESE: J1.3 Q3.2 R3.1
RESE': R2.2 R3.2 SJ1.2
RESET: C5.1 IC1.1 R_RESET.2 RESET_BUTTON.3 RESET_BUTTON.4 U2.3
RTC_RST: U2.16 U3.4
RX: TP2.TP U2.24
SCK: D10.1 J1.13 J4.P5 R6.1 TP8.TP U1.6 U2.6
SCL: J3.4 R2-PINH.1 SENSOR2.4 U2.20 U3.16 U4.7
SDA: J3.3 R1-PINH.1 SENSOR2.3 U2.19 U3.15 U4.8
SRC: C4.2 D5.2 L1.1 Q3.3
SS_SD: D8.1 J4.P2 R10.1 U2.4
TX: TP1.TP U2.25
USB_D+: D1.1 U2.14
USB_D-: D1.3 U2.13
VBAT: C2_BAT.1 MCP.3 Q1.3 TP3.TP U4.2 U4.3
VBUS [power]: C1_BAT.1 C4_USB.1 C5_USB.1 CHG_LED.A D1.5 D2.2 MCP.4 PFMF.050.1.2 Q1.1 R1_PWRUSB.2 TP14.TP
VRTC: C8.1 C10_SUPERCAP.2 R_CAPACITOR.1 U3.14
VUSB [power]: J2.A4 J2.A9 J2.B4 J2.B9 PFMF.050.1.1

## Tracks (layer width: path | path; a pad name or v marks a point on that pad's centre or on a via)
3V3  (via drill 0.3)
  Top 0.3: 12.74,99.65 8.93,99.65 R10.2 8.79,99.79 7.96,100.62 5.75,100.62 5.54,100.41 5.54,97.71 6.16,97.09 6.16,91.06 5.54,90.44 4.92,90.44 J4.P4 | 12.74,99.65 13.3,99.1 C9.1 | 43.63,106.78 21.4,106.78 20.91,107.27 20.36,107.27 R_CHANGE.1 20.29,107.13 v19.74,106.58 | 43.63,106.78 44.39,107.55 R_RESET.1 | 43.63,106.78 43.7,106.64 43.7,105.26 47.3,101.66 47.58,101.66 IC1.2 47.71,101.73 47.92,101.73 48.16,101.97 | 48.16,101.97 49.38,103.18 50.21,103.18 55.82,108.79 59.42,108.79 R_BOOT.1 | v13.5,100.34 12.88,99.72 12.74,99.65 | J3.2 165.23,18.84 152.07,18.84 127.14,43.77 C1_BAT2.1 126.94,43.84 124.17,43.84 123.33,44.67 C3.+ 123.13,44.67 122.64,44.18 119.53,44.18 IC4.5 119.39,44.25 v117.52,44.25 | v85.66,62.26 85.66,60.59 U3.2 | R_CL1.1 82.06,30.05 80.4,31.72 79.84,31.72 Q2.3 79.84,31.86 78.18,33.52 | 78.18,33.52 76.11,33.52 75,32.41 73.68,32.41 R8.2 | 84.42,47.51 84.42,46.95 78.25,40.79 78.25,33.66 78.18,33.52 | 84.42,47.51 84.42,48.2 R2-PINH1.2 | 84.42,47.51 90.51,47.51 93.14,50.14 93.14,58.66 91.55,60.25 R1_PINH1.2 91.41,60.39 91.41,62.46 88.02,65.86 86.36,65.86 85.32,64.82 D7.2 85.25,64.68 84.83,64.26 v84.83,63.92 84.69,63.85 57.06,63.85 49.79,56.58 U1.8 49.65,56.51 49.65,55.26 U1.7 49.58,55.12 47.71,53.25 47.71,52.28 45.6,50.17 | TP16.TP 2.56,38.16 4.22,38.16 8.93,42.87 U2.2 9.07,43.28 9.07,42.94 9.76,42.24 12.12,42.24 16.9,37.46 20.29,37.46 R1.1 20.43,37.4 v26.32,37.4 | 44.53,34.69 45.15,34.69 45.36,34.9 R5.2 45.5,34.83 46.67,33.66 48.2,33.66 R6.2 | 44.53,34.69 43.77,34.69 43.56,34.9 39.4,34.9 R7.2 39.27,35.04 36.91,37.4 v35.39,37.4
  Top 0.3: 45.6,50.17 41.83,53.95 U1.3 | 45.6,50.17 45.7,50.07 45.7,47.64 R9.2 45.64,47.51 44.53,46.4 44.53,34.69 | 48.16,101.97 49.24,100.9 v49.24,99.58
  Bottom 0.3: v19.74,106.58 v13.5,100.34 | v35.39,37.4 v26.32,37.4 | v117.52,44.25 104.01,44.25 86.08,62.19 85.8,62.19 v85.66,62.26 85.66,63.09 v84.83,63.92 84.76,64.06 v49.24,99.58
32KHZ
  Top 0.15: 83.93,50.07 R2-PINH1.1 | 83.93,50.07 83.93,62.39 85.59,64.06 85.8,64.06 86.77,65.03 86.77,65.3 86.91,65.44 87.88,65.44 88.02,65.3 88.02,61.56 87.05,60.59 U3.1 | U2.9 17.94,43.28 17.94,40.03 19.94,38.02 26.32,38.02 32.41,31.92 42.45,31.92 45.22,29.15 48.89,29.15 48.96,29.09 50.14,29.09 70.98,49.93 83.72,49.93 83.86,50.07 83.93,50.07
DN  (via drill 0.3)
  Top 0.15: 163.64,53.81 163.84,53.6 164.4,53.6 J2.B7 | 163.64,53.81 163.64,54.29 163.84,54.5 164.4,54.5 J2.A7 | v156.02,51.18 154.98,51.18 D1.4 | v163.43,53.67 163.57,53.81 163.64,53.81
  Bottom 0.15: v156.02,51.18 160.94,51.18 v163.43,53.67
DP
  Top 0.15: 165.02,54.08 164.47,54.08 J2.A6 | 165.02,54.08 165.23,54.29 165.23,54.78 165.02,54.98 164.47,54.98 J2.B6 | D1.6 154.98,52.98 156.71,52.98 159,50.69 163.64,50.69 163.78,50.55 165.51,50.55 166.13,51.18 166.13,52.91 165.02,54.02 165.02,54.08
EPD_3V3  (via drill 0.3)
  Top 0.3: 82.55,29.22 80.33,29.22 78.81,30.75 77.84,30.75 Q2.2 77.67,30.8 76.94,31.53 76.94,31.57 76.2,32.31 C7.1 | 82.55,29.22 82.75,29.43 82.75,34.35 82.61,34.49 L1.2 | J1.16 81.78,15.44 82.2,15.44 J1.15 82.2,15.58 v82.2,16.48 | 92.73,17.8 92.73,24.72 EPD_C5.1 | 92.73,17.8 97.78,12.74 TP17.TP | v92.59,17.73 92.73,17.8 | v82.61,28.95 82.61,29.09 82.55,29.22
  Bottom 0.3: v82.2,16.48 83.45,17.73 88.43,17.73 | v92.59,17.73 88.43,17.73 | v82.61,28.95 88.43,23.13 88.43,17.73
EPD_3V3_C  (via drill 0.3)
  Top 0.3: R_CL1.2 80.75,30.05 80.26,30.05 77.77,32.55 77.77,32.69 Q2.1 77.63,32.76 77.14,32.76 v76.94,32.96 | TP13.TP 21.54,66 20.5,64.96 20.5,60.87 U2.18 20.57,60.73 20.57,60.32 28.53,52.35 v30.68,52.35
  Bottom 0.3: v76.94,32.96 50.07,32.96 v30.68,52.35
EPD_BUSY  (via drill 0.3)
  Top 0.15: 73.68,15.1 76.52,12.26 77.01,12.26 77.7,12.95 87.95,12.95 89.61,14.61 89.61,15.93 88.64,16.9 86.36,16.9 85.32,15.86 85.32,15.44 J1.9 | 73.68,15.1 73.68,19.04 TP9.TP | v10.25,49.58 10.25,60.8 U2.26 | v70.91,13.16 71.67,13.16 73.61,15.1 73.68,15.1
  Bottom 0.15: v10.25,49.58 6.72,46.05 6.72,35.87 4.16,33.31 4.16,32.2 23.2,13.16 v70.91,13.16
EPD_CS  (via drill 0.3)
  Top 0.15: 84.9,17.45 83.79,16.34 83.79,15.44 J1.12 | 84.9,17.45 91,17.45 99.03,9.42 99.03,5.05 97.85,3.88 TP10.TP | v45.08,45.64 45.08,45.7 45.7,46.33 R9.1 | v43.63,45.36 43.63,45.77 43.21,46.19 D6.1 | v28.25,51.38 20.5,43.63 20.5,43.35 U2.11 | v84.9,21.4 84.9,17.45
  Bottom 0.15: v28.25,51.38 29.09,51.38 30.54,52.84 35.8,52.84 43.28,45.36 v43.63,45.36 43.9,45.64 v45.08,45.64 68.83,45.64 79.71,34.76 79.71,31.23 84.9,26.04 v84.9,21.4
EPD_DC  (via drill 0.3)
  Top 0.15: v84.55,16.2 84.28,15.93 84.28,15.44 J1.11 | v96.74,7.27 96.88,7.27 97.78,6.37 TP11.TP | v17.59,38.02 12.88,42.73 12.88,43.28 U2.5
  Bottom 0.15: v96.74,7.27 87.81,16.2 v84.55,16.2 84.48,16.2 83.58,15.3 47.71,15.3 25,38.02 v17.59,38.02
EPD_RST  (via drill 0.3)
  Top 0.15: 91.1,15.62 97.78,8.93 TP12.TP | J1.10 84.76,15.44 84.76,15.79 86.15,17.17 90.15,17.17 90.62,16.7 90.62,16.09 91.1,15.62 | v16.62,52.01 16.62,60.8 U2.21 | v86.22,12.46 87.95,12.46 91.1,15.62
  Bottom 0.15: v16.62,52.01 16.62,45.36 4.43,33.17 4.43,32.34 23.27,13.5 70.5,13.5 71.12,14.13 74.37,14.13 76.04,12.46 v86.22,12.46
FLASH_CS
  Top 0.15: D9.1 45.7,29.98 45.43,30.26 45.43,33.59 R5.1 45.36,33.66 40.44,33.66 39.75,34.35 30.4,34.35 21.74,43 21.74,43.28 U2.12 21.74,43.35 21.74,43.63 22.44,44.32 23.68,44.32 35.87,56.51 41.76,56.51 U1.1
GDR  (via drill 0.3)
  Top 0.15: v88.71,14.34 88.71,15.37 J1.2 | v71.26,13.64 70.98,13.64 64.96,19.67 64.82,19.67 R4.1 64.75,19.74 64.19,20.29 62.95,20.29 62.81,20.15 62.81,19.6 60.32,17.11 60.32,16.76 Q3.1
  Bottom 0.15: v88.71,14.34 86.36,11.98 72.92,11.98 v71.26,13.64
GND  (via drill 0.3, 0.35)
  Top 0.15: U2.29_3 12.26,51.87 13.43,51.87 U2.29_6 13.5,51.87 14.68,51.87 U2.29_9 14.75,51.8 14.75,50.62 U2.29_8 14.75,50.55 14.75,49.38 U2.29_7 14.68,49.38 13.5,49.38 U2.29_4 13.43,49.38 12.33,49.38 U2.29_1 | U2.29_1 12.26,49.38 12.26,50.55 U2.29_2 12.33,50.55 13.43,50.55 U2.29_5 | v7.76,44.87 7.76,43.35 U2.1 | U2.29_1 12.19,49.31 v11.49,48.61 10.6,48.61 7.76,51.45 7.76,60.8 U2.28 7.76,60.87 7.76,96.19 9.56,97.99 9.56,98.89 9.42,99.03 v7.13,99.03 6.37,99.79 D8.2 | 3.67,96.12 2.91,96.12 2.29,95.5 J4.G4 | 3.67,96.12 v4.22,96.12 | 3.67,96.12 3.67,93.69 4.71,92.66 4.85,92.66 J4.P6 4.71,92.59 1.25,89.12 1.25,82.34 J4.G3 | C6.2 68.56,107.55 65.79,107.55 BOOT_BUTTON.2 65.72,107.61 62.33,107.61 BOOT_BUTTON.1 62.19,107.55 55.61,100.97 52.08,100.97 C_DELAY.2 52.01,100.9 v51.24,100.9 51.24,60.11 45.77,54.64 U1.9 45.7,54.57 41.41,54.57 41.13,54.29 41.13,53.67 41.76,53.05 41.76,52.77 U1.4 41.83,49.1 43.14,47.78 D6.2 43.21,47.71 43.21,47.51 44.11,46.6 44.11,35.39 v43.97,35.25 | C5.2 53.32,107.55 50.76,107.55 RESET_BUTTON.2 50.69,107.61 47.3,107.61 RESET_BUTTON.1 47.23,107.61 45.5,107.61 44.94,108.17 28.53,108.17 27.98,107.61 C10.2 27.91,107.55 25.76,107.55 CHANGE_BUTTON.2 25.69,107.61 22.3,107.61 CHANGE_BUTTON.1 22.23,107.61 21.12,107.61 20.84,107.89 19.8,107.89 19.25,107.34 19.25,100.62 | 14.61,98.2 14.61,91.89 15.44,91.06 J4.G2 15.51,91 16.34,90.16 16.34,87.19 15.51,86.36 15.51,85.32 J4.G1 | 14.61,98.2 14.61,99.03 C9.2 14.68,99.1 16.2,100.62 19.25,100.62 | 19.25,100.62 47.58,100.62 IC1.3 47.64,100.69 47.85,100.9 v48.41,100.9 | v14.54,98.2 14.61,98.2
  Top 0.15: 158.17,13.02 157.61,13.02 157.13,13.5 157.13,13.78 SENSOR2.7 157.06,13.85 157.06,14.82 156.3,15.58 156.3,16.69 SENSOR2.1 | 158.17,13.02 158.65,13.5 158.65,13.78 SENSOR2.5 | 160.9,10.14 159.41,8.66 157.06,8.66 156.23,9.49 C2.2 156.16,9.56 154.98,9.56 C1.2 154.91,9.49 150.48,9.49 149.93,8.93 TP5.TP 149.79,8.86 146.12,8.86 TP4.TP | 160.9,10.14 165.23,14.47 165.23,17.8 J3.1 165.3,17.87 165.58,17.87 167.65,19.94 167.65,47.92 168.9,49.17 J2.MP1 168.9,49.24 168.9,58.17 | v158.17,12.88 158.17,13.02 | v160.87,10.18 160.9,10.14 | 168.9,58.17 168.9,59.35 J2.MP2 | J2.A1 164.4,50.97 164.4,51.24 J2.B12 164.33,51.24 163.71,51.24 v163.43,51.52 | v161.63,55.26 157.54,55.26 R2-USB.2 | v163.43,57.06 163.57,57.06 163.84,57.34 164.4,57.34 J2.B1 164.4,57.41 164.4,57.62 J2.A12 164.47,57.69 164.95,58.17 | v163.5,50.21 164.47,49.24 164.95,49.24 J2.MP3 | 164.95,58.17 164.95,59.35 J2.MP4 | 164.95,58.17 168.9,58.17 | U4.9 130.81,55.82 130.19,55.19 129.84,55.19 U4.4 129.77,55.19 124.51,55.19 C2_BAT.2 124.51,55.12 v123.54,54.15 | U4.9 130.88,55.82 131.02,55.68 131.78,55.68 U4.6 131.85,55.61 146.88,55.61 149.79,52.7 R2-USB1.1 149.93,52.7 150.9,52.7 151.52,52.08 D1.2 152.49,52.01 152.77,52.01 154.29,50.48 154.29,50.41 | U4.1 129.84,56.58 130.19,56.58 130.81,55.95 U4.9 | C4_USB.2 154.29,49.51 C5_USB.2 154.29,49.58 154.29,50.41 | v154.36,50.41 154.29,50.41 | 121.84,51.07 122.78,52.01 122.78,52.77 122.23,53.32 122.02,53.32 MCP.2 | 121.84,51.07 120.98,50.21 119.39,50.21 R2_BAT.1 | 121.84,51.07 120.01,52.91 118.69,52.91 117.86,52.08 117.24,52.08 C1_BAT.2 | C1_BAT2.2 126.94,42.52 124.03,42.52 C3.- 123.13,41.69 117.59,41.69 117.45,41.83 117.38,41.83
  Top 0.15: 117.38,41.83 115.44,39.89 115.44,39.61 C1_BAT1.2 115.37,39.54 114.68,38.85 113.71,38.85 111.77,40.79 111.77,42.59 R1_PWRUSB.1 111.7,42.66 111.08,43.28 111.08,46.88 | 117.38,41.83 117.38,42.66 116.89,43.14 116.75,43.14 IC4.2 | 111.08,46.88 111.08,55.05 111.84,55.82 119.04,55.82 121.53,53.32 121.88,53.32 MCP.2 | D12.2 73.2,25.41 73.82,26.04 74.93,26.04 EPD_C12.2 75,26.11 76.17,26.11 | 76.17,26.11 77.42,26.11 EPD_C11.2 77.49,26.11 79.98,26.11 EPD_C10.2 80.05,26.11 80.54,26.11 v80.81,26.38 | 76.17,26.11 76.17,31.09 C7.2 | 78.01,13.68 78.81,14.47 85.18,14.47 85.73,15.03 85.73,15.37 J1.8 | 78.01,13.68 77.28,12.95 76.8,12.95 J1.MP2 | v81.3,16.41 81.3,15.44 J1.17 | v81.72,25.21 82.55,26.04 EPD_C9.2 | v75.14,16.55 78.01,13.68 | C10_SUPERCAP.1 92.1,51.04 91.76,51.38 89.68,51.38 C8.2 89.61,51.45 v88.43,52.63 | v83.45,52.63 83.24,52.42 83.24,51.24 U3.13 | EPD_C5.2 92.66,26.11 90.23,26.11 EPD_C6.2 90.23,26.18 89.75,26.66 | 89.75,26.66 89.75,34.28 D3.1 90.79,35.39 v90.79,46.88 111.08,46.88 | 89.75,26.66 89.68,26.66 89.12,26.11 87.67,26.11 EPD_C7.2 87.6,26.11 85.11,26.11 EPD_C8.2 85.04,26.04 v84.28,25.28 | D10.2 48.2,28.46 45.77,28.46 D9.2 45.7,28.53 45.43,28.53 44.04,29.92 42.1,29.92 | 42.1,29.92 39.4,29.92 D11.2 39.4,29.85 38.64,29.09 38.64,27.91 52.63,13.92 57.69,13.92 R2.1 57.76,13.92 57.76,11.56 57.69,11.49 SJ1.1 57.69,11.43 57.69,11.22 58.52,10.39 59.83,10.39 60.25,10.8 60.25,12.6 60.94,13.3 EPD_C2.2 61.01,13.37 64.26,13.37 65.79,14.89 | 65.75,14.92 65.44,15.23 EPD_C1.2 65.37,15.3 64.82,15.86 64.82,18.35 R4.2 | 65.75,14.92 65.79,14.89 | 65.79,14.89 68.7,11.98 87.88,11.98 88.78,12.88 90.23,12.88 J1.MP1
  Top 0.15: 42.1,29.92 v42.1,31.44 | 65.75,14.92 v67.38,16.55 | v122.92,53.53 122.5,53.12 MCP.2
  Bottom 0.15: v11.49,48.61 v7.76,44.87 | v4.22,96.12 v7.13,99.03 13.71,99.03 v14.54,98.2 | v48.41,100.9 v51.24,100.9 | v160.87,10.18 v158.17,12.88 | v163.43,57.06 162.08,55.71 | 162.08,55.71 v161.63,55.26 | 162.08,55.71 163.91,53.88 163.91,53.53 163.43,53.05 v163.43,51.52 163.5,51.52 v163.5,50.21 163.43,50.41 v154.36,50.41 | v81.3,16.41 81.72,16.83 81.72,17.52 | v81.72,25.21 81.72,17.52 | 81.72,17.52 81.09,17.52 80.12,16.55 v75.14,16.55 v67.38,16.55 | v80.81,26.38 80.81,26.18 81.72,25.28 v81.72,25.21 | v83.45,52.63 v88.43,52.63 88.43,49.24 v90.79,46.88 | v84.28,25.28 81.78,25.28 v81.72,25.21 | v43.97,35.25 43.97,33.31 v42.1,31.44 | v122.92,53.53 v123.54,54.15
  other vias: 26.67,48.26 27.94,45.72 19.05,40.64 16.51,40.64 17.78,39.37 12.7,45.72 11.43,45.72 41.91,34.29 13.97,63.5 26.67,60.96 79.5,39.37 87.63,40.64 77.47,31.75 85.09,55.88 83.82,20.32 90.17,16.51 153.67,45.72 156.21,54.61 166.37,54.61 161.29,53.34 49.53,38.1 7.62,71.12 7.62,48.26 15.24,41.91 73.66,12.7 85.09,13.97 160.02,52.07 87.63,53.34
  pour Bottom: 74.89,8.95 74.92,8.96 91.45,8.96 91.48,8.95 91.5,8.93 91.52,8.9 91.52,-1.2 171.38,-1.2 171.38,68.5 92.7,68.5 92.67,68.52 92.65,68.54 92.64,68.57 92.64,111.69 67.39,111.69 67.39,110.48 67.37,110.45 67.35,110.43 67.32,110.42 21.58,110.42 21.55,110.43 21.53,110.45 21.52,110.48 21.52,111.69 -1.2,111.69 -1.2,-1.2 74.86,-1.2 74.86,8.9 74.87,8.93
  pour Top: 74.89,8.95 74.92,8.96 91.45,8.96 91.48,8.95 91.5,8.93 91.52,8.9 91.52,-1.2 171.38,-1.2 171.38,68.5 92.7,68.5 92.67,68.52 92.65,68.54 92.64,68.57 92.64,111.69 67.39,111.69 67.39,110.48 67.37,110.45 67.35,110.43 67.32,110.42 21.58,110.42 21.55,110.43 21.53,110.45 21.52,110.48 21.52,111.69 -1.2,111.69 -1.2,-1.2 74.86,-1.2 74.86,8.9 74.87,8.93
GPIO8
  Top 0.15: R1.2 20.29,38.78 20.29,41.97 19.18,43.07 19.18,43.28 U2.10
I2C_PW  (via drill 0.3)
  Top 0.15: C1.1 154.98,10.8 156.16,10.8 C2.1 156.23,10.87 156.23,13.78 SENSOR2.8 156.23,13.85 156.23,15.23 155.81,15.65 155.81,17.45 | SENSOR2.6 157.82,13.85 157.82,14.47 157.13,15.17 157.13,16.69 SENSOR2.2 157.06,16.76 157.06,16.97 156.57,17.45 155.81,17.45 | v27.84,54.43 21.74,60.52 21.74,60.8 U2.17 | v103.6,43.9 108.24,43.9 134.69,17.45 155.81,17.45
  Bottom 0.15: v27.84,54.43 93.07,54.43 v103.6,43.9
INT_RTC  (via drill 0.3)
  Top 0.15: v86.49,59.07 91.41,59.07 R1_PINH1.1 | v85.52,59.07 84.48,60.11 84.48,60.52 U3.3 | v16.62,36.98 2.56,22.92 TP15.TP | v38.02,59.07 30.82,51.87 24.93,51.87 16.69,43.63 16.69,43.35 U2.8 16.63,41.16 16.96,40.83 16.96,40.45 16.62,40.11 v16.62,39.61
  Bottom 0.15: v86.49,59.07 v85.52,59.07 v38.02,59.07 | v16.62,36.98 v16.62,39.61
IO/BOOT
  Top 0.15: C6.1 68.56,108.86 66,108.86 65.79,109.07 BOOT_BUTTON.3 65.72,109.14 62.26,109.14 BOOT_BUTTON.4 62.19,109.07 60.73,107.61 59.49,107.61 R_BOOT.2 59.42,107.48 53.6,101.66 50.34,101.66 49.72,101.04 49.72,79.84 30.38,60.51 26.48,60.51 26.17,60.82 U2.15
IO/CHANGE
  Top 0.15: C10.1 27.91,108.86 25.97,108.86 25.76,109.07 CHANGE_BUTTON.3 25.69,109.14 22.3,109.14 CHANGE_BUTTON.4 22.23,109.07 21.81,108.65 20.36,108.65 R_CHANGE.2 20.29,108.58 18.07,108.58 13.99,104.5 13.99,84.97 15.23,83.72 15.23,66.83 14.42,66.01 14.42,61.15 U2.23
MISO  (via drill 0.3)
  Top 0.15: TP6.TP 72.37,21.61 72.37,24.65 71.67,25.35 D12.1 71.67,25.41 73.61,27.35 73.61,31.09 R8.1 73.54,31.09 v63.16,41.48 | v35.25,55.26 40.86,55.26 | 40.86,55.26 41.76,55.26 U1.2 | v9.76,59.69 9.76,59.83 9.07,60.52 9.07,60.8 U2.27 9,60.87 v9,63.02 | v4.16,95.5 4.09,95.43 4.09,94.39 4.71,93.76 5.05,93.76 J4.P7 | v43.28,44.87 40.86,47.3 40.86,55.26
  Bottom 0.15: v35.25,55.26 14.2,55.26 v9.76,59.69 | v4.16,95.5 4.16,91.62 9,86.77 v9,63.02 | v63.16,41.48 46.67,41.48 v43.28,44.87
MOSI  (via drill 0.3)
  Top 0.15: J1.14 82.68,15.37 82.68,14.96 82.48,14.75 77.56,14.75 74.93,17.38 74.93,19.53 74.1,20.36 67.31,20.36 59.9,27.77 40.03,27.77 39.4,28.39 D11.1 39.4,28.46 v40.16,29.22 | v40.16,32.83 39.4,33.59 R7.1 | v16.14,42.17 15.37,42.94 15.37,43.28 U2.7 | v6.23,88.92 5.89,89.26 5.12,89.26 J4.P3 | v13.64,39.96 2.56,28.88 2.56,27.98 TP7.TP | U1.5 49.62,38.62 49.96,38.28 49.96,33.34 v49.44,32.83
  Bottom 0.15: v40.16,29.22 40.16,30.95 | 40.16,30.95 v40.16,32.83 40.16,33.66 31.65,42.17 17.11,42.17 | v49.44,32.83 44.11,32.83 42.24,30.95 40.16,30.95 | 17.11,42.17 v16.14,42.17 16.11,42.17 13.89,39.96 v13.64,39.96 | v6.23,88.92 6.23,62.05 8.03,60.25 8.03,48.82 8.38,48.48 8.66,48.48 9.76,49.58 9.76,49.72 12.53,52.49 16.76,52.49 17.11,52.15 17.11,42.17
N$1  (via drill 0.3)
  Top 0.15: v151.45,51.45 149.93,51.45 R2-USB1.2 | v162.18,53.05 164.4,53.05 J2.A5
  Bottom 0.15: v151.45,51.45 155.67,51.45 157.11,52.89 161.48,52.89 161.64,53.05 v162.18,53.05
N$2
  Top 0.15: R2-USB.1 157.54,54.02 161.84,54.02 163.84,56.02 164.4,56.02 J2.B5
N$3
  Top 0.15: C1_BAT1.1 114.19,39.61 114.19,42.03 114.26,42.1 D2.1 114.33,42.17 115.99,42.17 | 115.99,42.17 116.69,42.17 IC4.3 | 115.99,42.17 115.99,43.56 116.55,44.11 116.69,44.11 IC4.1 116.75,44.18 121.81,49.24 126.52,49.24 127.21,48.54 127.91,48.54 Q1.2
N$4
  Top 0.15: D3.2 93.21,34.35 95.01,36.15 95.22,36.15 C4.1 94.87,36.08 93.21,37.74 93.21,38.09 D4.1
N$5
  Top 0.15: CHG_LED.C 116.06,54.64 113.71,54.64 R1_BAT.2
N$6
  Top 0.15: R1_BAT.1 112.39,54.57 112.6,54.57 113.99,53.18 120.91,53.18 121.67,52.42 121.95,52.42 MCP.1
N$7
  Top 0.15: J1.24 77.7,15.44 77.7,22.02 75,24.72 EPD_C12.1
N$8
  Top 0.15: R1-PINH.2 157.54,10.8 158.72,10.8 R2-PINH.2
N$9
  Top 0.15: R2_BAT.2 119.32,48.89 119.32,49.1 118.69,49.72 118.69,51.73 119.32,52.35 MCP.5
N$10
  Top 0.15: J1.22 78.81,15.44 78.81,23.55 79.98,24.72 EPD_C10.1
N$11
  Top 0.15: C_DELAY.1 52.01,102.28 50.62,102.28 50.41,102.49 IC1.5
N$12
  Top 0.15: J1.20 79.78,15.44 79.78,17.94 85.04,23.2 85.04,24.72 EPD_C8.1
N$13
  Top 0.15: J1.19 80.26,15.44 80.26,17.4 87.61,24.75 EPD_C7.1
N$14  (via drill 0.3)
  Top 0.15: v82.55,18.97 80.75,17.17 80.75,15.44 J1.18 | v87.88,22.44 90.16,24.72 EPD_C6.1
  Bottom 0.15: v82.55,18.97 84.42,18.97 v87.88,22.44
N$15
  Top 0.15: R_CAPACITOR.2 85.73,63.09 87.39,64.75 D7.1
N$25  (via drill 0.3)
  Top 0.15: v85.94,14.61 86.84,14.61 87.19,14.96 87.19,15.37 J1.5 | v65.79,14.27 65.58,14.27 63.43,12.12 61.01,12.12 EPD_C2.1
  Bottom 0.15: v65.79,14.27 66.48,14.96 75.21,14.96 75.49,14.68 85.38,14.68 85.45,14.61 v85.94,14.61
N$26  (via drill 0.3)
  Top 0.15: v86.84,14.13 87.74,15.03 87.74,15.37 J1.4 | v64.82,14.54 EPD_C1.1
  Bottom 0.15: v64.82,14.54 65.58,13.78 65.93,13.78 66.55,14.4 74.51,14.4 74.52,14.4 85.27,14.4 85.54,14.13 v86.84,14.13
PREVGH
  Top 0.15: J1.21 79.29,15.44 79.29,21.47 82.55,24.72 EPD_C9.1 82.61,24.79 83.65,25.83 83.65,29.57 90.51,36.42 90.51,38.57 86.56,42.52 83.58,42.52 83.03,41.97 80.81,41.97 D5.1
PREVGL
  Top 0.15: 78.18,24.03 78.18,15.44 J1.23 | 78.18,24.03 77.49,24.72 EPD_C11.1 | D4.2 89.68,38.09 89.68,36.01 83.17,29.5 83.17,28.12 80.4,25.35 79.43,25.35 78.18,24.1 78.18,24.03
RESE  (via drill 0.3)
  Top 0.15: v88.22,16.41 88.22,15.44 J1.3 | v61.63,15.79 61.63,16.69 Q3.2 61.63,16.76 61.63,17.66 63.43,19.46 63.43,19.67 R3.1
  Bottom 0.15: v88.22,16.41 88.02,16.41 87.74,16.69 83.03,16.69 82.13,15.79 v61.63,15.79
RESE'
  Top 0.15: SJ1.2 59.14,11.49 59.07,11.56 59.07,13.92 R2.2 59.14,13.99 60.45,13.99 63.43,16.97 63.43,18.35 R3.2
RESET  (via drill 0.3)
  Top 0.15: C5.1 53.32,108.86 50.97,108.86 50.76,109.07 RESET_BUTTON.3 50.69,109.07 49.38,109.07 48.41,108.1 v48.34,108.1 47.3,109.14 RESET_BUTTON.4 47.23,109.07 47.02,108.86 44.46,108.86 R_RESET.2 | v47.64,106.71 47.64,102.56 IC1.1 | v8.52,48.96 10.25,47.23 10.25,43.35 U2.3
  Bottom 0.15: v48.34,108.1 47.64,107.41 v47.64,106.71 47.64,101.04 8.52,61.91 v8.52,48.96
RTC_RST  (via drill 0.3)
  Top 0.15: v31.09,61.84 23.75,61.84 22.99,61.08 22.99,60.87 U2.16 | v81.44,61.84 82.2,61.84 83.17,60.87 83.17,60.59 U3.4
  Bottom 0.15: v81.44,61.84 v31.09,61.84
RX
  Top 0.15: U2.24 12.88,60.87 12.88,66.2 13.92,67.24 TP2.TP
SCK  (via drill 0.3)
  Top 0.15: v14.06,42.17 14.06,43.28 U2.6 14.06,43.35 14.06,45 12.89,46.17 12.55,46.17 v7.27,51.45 | v4.92,33.03 2.56,33.03 TP8.TP | v3.95,91.13 4.29,91.48 5.05,91.48 J4.P5 | v81.23,17.04 82.27,17.04 83.24,16.07 83.24,15.44 J1.13 | D10.1 48.27,29.92 48.61,29.57 v49.1,29.57 48.96,29.64 48.96,34.07 48.27,34.76 48.27,34.9 R6.1 48.27,34.97 48.27,52.35 49.58,53.67 49.58,53.95 U1.6
  Bottom 0.15: v4.92,33.03 12.43,40.55 | 12.43,40.55 v14.06,42.17 | v3.95,91.13 3.95,63.92 7.27,60.59 v7.27,51.45 | v81.23,17.04 81.02,17.04 80.05,16.07 62.6,16.07 v49.1,29.57 49.03,29.57 48.2,28.74 40.03,28.74 39.68,29.09 39.68,33.73 33.31,40.1 16.48,40.1 15.86,39.47 13.5,39.47 12.43,40.55
SCL  (via drill 0.3)
  Top 0.15: v159.34,14.06 159.41,13.99 159.41,10.39 158.79,9.76 158.79,9.56 R2-PINH.1 | v159.34,16.07 158.72,16.69 SENSOR2.4 | v132.54,56.09 131.85,56.09 U4.7 | v140.78,47.37 140.3,47.37 139.95,47.02 139.95,46.12 164.64,21.43 | 164.64,21.43 165.23,20.84 J3.4 | 164.64,21.43 v164.19,20.98 | v24.52,53.95 17.94,60.52 17.94,60.8 U2.20 | v86.63,53.12 86.63,51.59 86.98,51.24 U3.16
  Bottom 0.15: v159.34,14.06 v159.34,16.07 159.34,16.14 v164.19,20.98 | v140.78,47.37 140.78,49.1 133.31,56.58 133.03,56.58 v132.54,56.09 132.54,47.3 128.04,42.8 117.45,42.8 116.83,43.42 103.46,43.42 93.82,53.06 87.95,53.06 87.81,52.91 87.45,52.91 87.25,53.12 v86.63,53.12 85.8,53.95 v24.52,53.95
SDA  (via drill 0.3)
  Top 0.15: v26.38,53.32 19.18,60.52 19.18,60.8 U2.19 | v86.36,50.07 86.36,50.55 85.73,51.18 U3.15 | R1-PINH.1 157.54,9.49 157.68,9.49 158.24,8.93 159.28,8.93 159.83,9.49 159.83,14.47 157.89,16.41 SENSOR2.3 157.89,16.76 157.89,17.04 v159.07,18.21 | v133.17,56.09 132.68,56.58 131.85,56.58 U4.8 | 162.7,21.85 164.75,19.8 165.23,19.8 J3.3 | 162.7,21.85 v139.05,45.5 | v162.67,21.81 162.7,21.85
  Bottom 0.15: v26.38,53.32 82.13,53.32 85.39,50.07 v86.36,50.07 86.98,50.07 91.62,45.43 101.04,45.43 103.6,42.87 116.96,42.87 117.31,42.52 128.25,42.52 135.14,49.41 | v133.17,56.09 133.17,51.38 135.14,49.41 | v139.05,45.5 135.14,49.41 | v162.67,21.81 v159.07,18.21
SRC  (via drill 0.3)
  Top 0.15: v94.11,37.53 95.22,37.53 C4.2 | 84.87,41.38 84.35,41.9 D5.2 | 84.87,41.38 v88.71,37.53 | v64.61,22.44 61.01,18.84 Q3.3 | v79.22,34.62 79.22,35.73 82.55,39.06 L1.1 82.61,39.13 84.87,41.38
  Bottom 0.15: v88.71,37.53 v94.11,37.53 | v64.61,22.44 67.03,22.44 v79.22,34.62
SS_SD
  Top 0.15: R10.1 8.86,98.4 6.44,98.4 6.37,98.33 D8.1 6.72,98.33 6.72,88.78 6.16,88.22 5.54,88.22 J4.P2 6.16,88.16 6.72,87.6 6.72,51.38 11.88,46.22 11.88,45.53 11.55,45.2 U2.4
TX
  Top 0.15: U2.25 11.49,60.87 11.49,66.2 10.32,67.38 TP1.TP
USB_D+  (via drill 0.3)
  Top 0.15: v151.24,52.98 152.42,52.98 D1.1 | v39.75,49.51 30.47,49.51 24.31,43.35 U2.14
  Bottom 0.15: v151.24,52.98 147.16,52.98 136.42,42.24 73.06,42.24 65.79,49.51 v39.75,49.51
USB_D-  (via drill 0.3)
  Top 0.15: v149.79,48.48 152.42,51.11 D1.3 | U2.13 22.99,43.28 22.99,43.07 23.75,42.31 25.17,42.31 31.75,48.89 v40.37,48.89
  Bottom 0.15: v149.79,48.48 143.07,48.48 136.56,41.97 72.92,41.97 66,48.89 v40.37,48.89
VBAT
  Top 0.15: U4.3 129.84,55.68 129.84,56.09 U4.2 129.77,56.16 129.22,56.16 | 122.85,54.22 126.38,50.69 126.94,50.69 Q1.3 | 122.85,54.22 122.02,54.22 MCP.3 | 122.85,54.22 122.85,54.71 124.44,56.3 124.44,56.51 C2_BAT.1 124.51,56.3 124.65,56.16 129.22,56.16 | 129.22,56.16 129.22,56.85 137.12,64.75 152.35,64.75 TP3.TP
VBUS
  Top 0.3: TP14.TP 156.16,64.75 156.16,55.61 154.01,53.46 154.01,52.63 154.57,52.08 154.77,52.08 D1.5 154.98,52.01 155.95,52.01 156.57,51.38 156.57,50.55 155.67,49.65 C5_USB.1 155.6,49.51 155.6,48.27 C4_USB.1 155.67,48.13 155.88,47.92 155.88,45.77 PFMF.050.1.2 155.74,47.51 152.63,47.51 152.21,47.92 128.81,47.92 128.67,47.99 | MCP.4 119.32,54.29 119.04,54.57 117.66,54.57 CHG_LED.A 117.45,54.64 117.31,54.64 116.55,55.4 111.98,55.4 111.7,55.12 111.7,54.08 113.71,52.08 115.72,52.08 C1_BAT.1 115.86,52.01 115.86,48.2 | R1_PWRUSB.2 113.99,43.9 114.26,44.18 D2.2 114.4,44.32 115.86,45.77 115.86,48.2 | 128.67,47.99 128.46,47.78 127.42,47.78 126.73,48.48 126.1,48.48 Q1.1 | 128.67,47.99 128.67,49.1 128.11,49.65 121.39,49.65 119.94,48.2 115.86,48.2
VRTC
  Top 0.15: 87.64,54.74 89.61,52.77 C8.1 89.68,52.77 90.03,53.12 92.1,53.12 C10_SUPERCAP.2 | 87.64,54.74 86.01,56.37 86.01,59.21 86.28,59.49 86.28,61.42 86.98,62.12 86.98,63.02 R_CAPACITOR.1 | 87.64,54.74 84.48,51.59 84.48,51.24 U3.14
VUSB
  Top 0.3: J2.A4 164.4,51.8 164.4,52.01 J2.B9 164.39,52.08 160.73,52.08 160.23,52.57 157.67,52.57 156.75,53.49 156.75,55.79 157.47,56.51 164.26,56.51 J2.B4 | J2.B4 164.4,56.58 164.4,56.78 J2.A9 | PFMF.050.1.1 151.45,45.7 152.94,45.7 155.02,43.63 161.98,43.63 166.9,48.55 166.9,54.83 165.22,56.51 164.54,56.51 J2.B4

## Text on the board
tPlace: TX | RX | EPD_3V3_C | VBUS | VBAT | 3V3 | SCK | MOSI | INT_RTC | MISO | EPD_BUSY | EPD_3V3 | GND | GND | EPD_RST | EPD_DC | EPD_CS